# EAGLE board vONE-UNO (EAGLE 9.6.2)
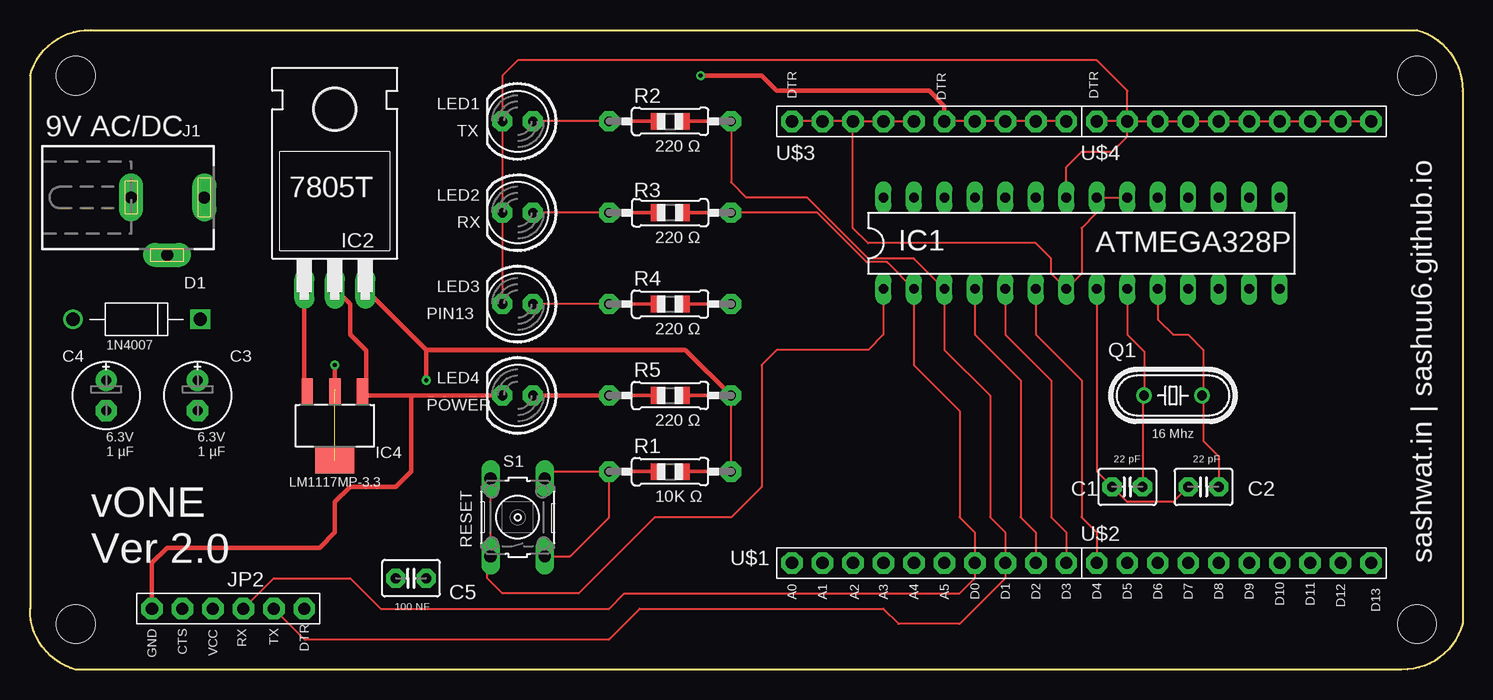
[diagram p0: board, top side]
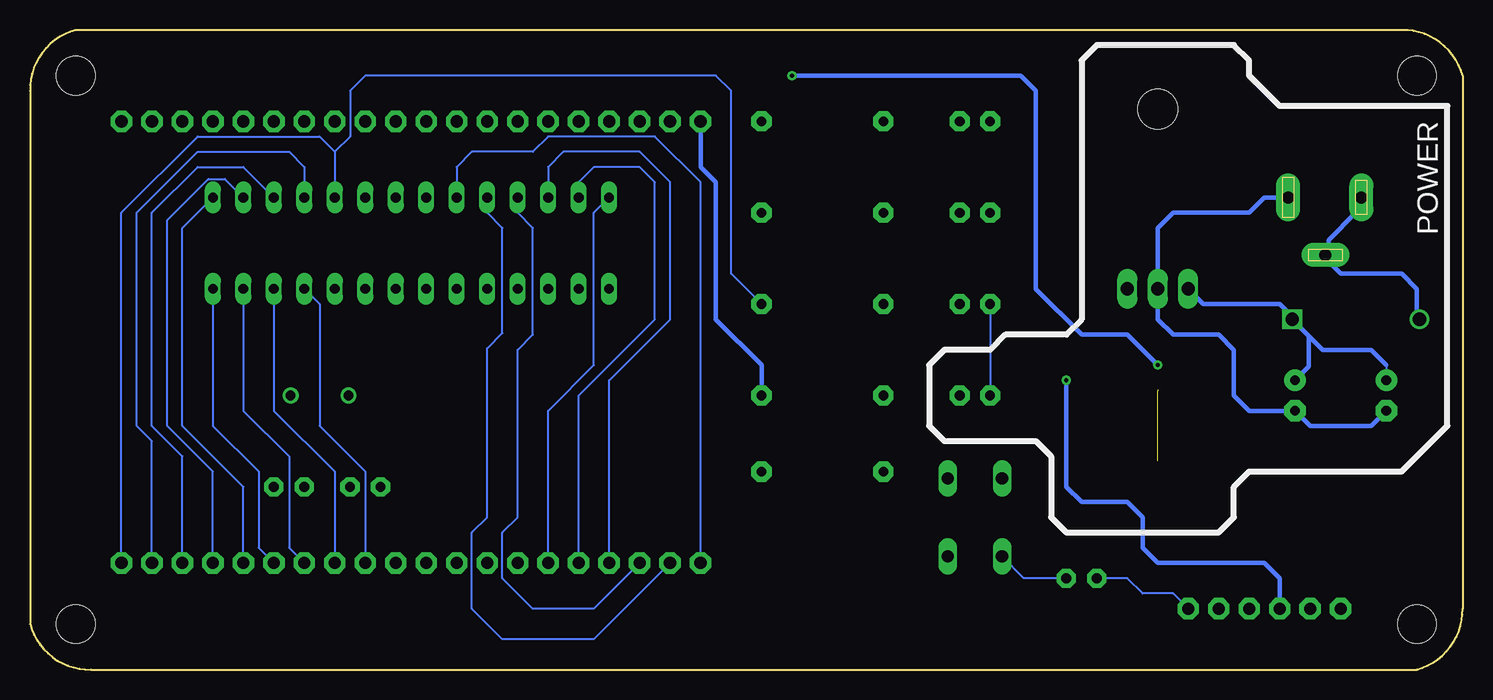
[diagram p1: board, bottom side, seen from below]

Size 119.38 x 53.34 mm. Coordinates in mm from the lower left corner, seen from the top.
Outline: 5.08,53.34 115.57,53.34 arc-76 119.38,48.26 119.38,3.81 arc-76 114.3,0 3.81,0 arc-76 0,5.08 0,49.53 arc-76 5.08,53.34
Copper layers (1*16): Top 0.035mm / dielectric 1.5mm / Bottom 0.035mm
Design rules "default": minimum track width 6mil, minimum drill 0.35mm, track to track 6mil, track to pad 6mil, pad to pad 6mil, via to via 6mil, smd to smd 6mil, copper to edge 40mil, drill to drill 6mil, minimum pad ring 10mil, minimum via ring 8mil, stop-mask expansion 4mil, vias tented up to drill 0mil, thermal gap 10mil
Holes 3.2 mm at 3.81,49.53 3.81,3.81 115.57,3.81 115.57,49.53

## Footprints (pad centres in the part's own frame; a part is rotated, then mirrored left to right if it is on the bottom)
C2.5-3 = drill 0.813 pad 1.6 octagon: 1 -1.27,0; 2 1.27,0
E2,5-6E = drill 0.813 pad 1.778: + -1.27,0 | drill 0.813 pad 1.778 octagon: - 1.27,0
DIOAD1060W80L520D270 = drill 1.1 pad 1.65: A 5.3,0 | drill 1.1 pad 1.65 square: C -5.3,0
DIL28-3 = drill 0.813 long: 1 -16.51,-3.81; 2 -13.97,-3.81; 3 -11.43,-3.81; 4 -8.89,-3.81; 5 -6.35,-3.81; 6 -3.81,-3.81; 7 -1.27,-3.81; 8 1.27,-3.81; 9 3.81,-3.81; 10 6.35,-3.81; 11 8.89,-3.81; 12 11.43,-3.81; 13 13.97,-3.81; 14 16.51,-3.81; 15 16.51,3.81; 16 13.97,3.81; 17 11.43,3.81; 18 8.89,3.81; 19 6.35,3.81; 20 3.81,3.81; 21 1.27,3.81; 22 -1.27,3.81; 23 -3.81,3.81; 24 -6.35,3.81; 25 -8.89,3.81; 26 -11.43,3.81; 27 -13.97,3.81; 28 -16.51,3.81
TO220H = drill 1.118 long: 1 -2.54,-10.16; 2 0,-10.16; 3 2.54,-10.16 | hole 3.302: 0,4.826
SOT223 = smd 0.95 x 2.15: 1 -2.3,-2.9; 2 0,-2.9; 3 2.3,-2.9 | smd 3.25 x 2.15: 4 0,2.9
DCJ0303 = drill 1 pad 2 long: 1 0,3.1; 2 4.8,0; 3 0,-3
1X06-BIG = drill 1.016 pad 1.778 octagon: 1 -6.35,0; 2 -3.81,0; 3 -1.27,0; 4 1.27,0; 5 3.81,0; 6 6.35,0
LED5MM = drill 0.813 pad 1.676 octagon: A -1.27,0; K 1.27,0
HC49/S = drill 0.813: 1 -2.413,0; 2 2.413,0
0805-THM = drill 0.813 pad 1.676 octagon: 1 -5.08,0; 2 5.08,0
B3F-10XX = drill 1.016 long: 1 -3.251,2.261; 2 3.251,2.261; 3 -3.251,-2.261; 4 3.251,-2.261
1X10-BIG = drill 1.016 pad 1.778 octagon: 1 -11.43,0; 2 -8.89,0; 3 -6.35,0; 4 -3.81,0; 5 -1.27,0; 6 1.27,0; 7 3.81,0; 8 6.35,0; 9 8.89,0; 10 11.43,0

## Placement (x,y rotation side)
C1  22pF  [C2.5-3]  91.44,15.24 0 top
C2  22pF  [C2.5-3]  97.79,15.24 0 top
C3  [E2,5-6E]  13.97,22.86 270 top
C4  [E2,5-6E]  6.35,22.86 270 top
C5  100 NF  [C2.5-3]  31.75,7.62 180 top
D1  1N4007  [DIOAD1060W80L520D270]  8.89,29.21 180 top
IC1  ATMEGA328-20P  [DIL28-3]  87.63,35.56 0 top
IC2  7805T  [TO220H]  25.4,41.91 0 top
IC4  LM1117MP-3.3  [SOT223]  25.4,20.32 180 top
J1  [DCJ0303]  11.43,39.37 270 top
JP2  [1X06-BIG]  16.51,5.08 0 top
LED1  [LED5MM]  40.64,45.72 180 top
LED2  [LED5MM]  40.64,38.1 180 top
LED3  [LED5MM]  40.64,30.48 180 top
LED4  [LED5MM]  40.64,22.86 180 top
Q1  16 MHz  [HC49/S]  95.25,22.86 180 top
R1  10K  [0805-THM]  53.34,16.51 0 top
R2  220  [0805-THM]  53.34,45.72 0 top
R3  220  [0805-THM]  53.34,38.1 180 top
R4  220  [0805-THM]  53.34,30.48 0 top
R5  220  [0805-THM]  53.34,22.86 0 top
S1  [B3F-10XX]  40.64,12.7 90 top
U$1  PINHD-1X10  [1X10-BIG]  74.93,8.89 0 top
U$2  PINHD-1X10  [1X10-BIG]  100.33,8.89 0 top
U$3  PINHD-1X10  [1X10-BIG]  74.93,45.72 0 top
U$4  PINHD-1X10  [1X10-BIG]  100.33,45.72 0 top

## Library data of the parts
C1 C2 C5 = capacitor-wima
C3 C4 IC2 JP2 LED1-LED4 R1-R5 U$1-U$4 = adafruit
D1 = 1N4007; AVAILABILITY: Unavailable; DESCRIPTION: Diode Standard 1000V 1A Through Hole DO-41; MF: ON Semiconductor; MP: 1N4007; PACKAGE: DO-41-2 ON Semiconductor; PRICE: None
IC1 = atmega328
IC4 = lm1117_10; MF: Texas Instruments; MPN: LM1117MP-3.3; OC_FARNELL: 9778195; OC_NEWARK: 28X3416
J1 = con-jack; OC_FARNELL: unknown; OC_NEWARK: unknown
Q1 = adafruit; OC_FARNELL: 1667008; OC_NEWARK: unknown
S1 = switch-omron; MPN: B3F-1000; OC_FARNELL: 176432; OC_NEWARK: 36M3542

## Nets
0: C3.- C4.- IC1.22 IC2.2 IC4.1 J1.1 JP2.1 LED1.K LED2.K LED3.K LED4.K U$4.1 U$4.2 U$4.3 U$4.4 U$4.5 U$4.6 U$4.7 U$4.8 U$4.9 U$4.10
N$1: D1.A J1.2 J1.3
N$2: C5.1 IC1.1 S1.1 S1.2
N$3: C1.1 C2.1 IC1.8
N$4: IC1.23 U$1.1
N$5: IC1.24 U$1.2
N$6: IC1.25 U$1.3
N$7: IC1.26 U$1.4
N$8: IC1.27 U$1.5
N$9: IC1.28 U$1.6
N$10: IC1.2 JP2.4 R3.1 U$1.7
N$11: R1.1 S1.3 S1.4
N$12: C1.2 IC1.9 Q1.2
N$13: C2.2 IC1.10 Q1.1
N$14: IC1.4 U$1.9
N$15: IC1.5 U$1.10
N$16: IC1.19 R4.2 U$2.10
N$17: IC1.11 U$2.2
N$18: IC1.12 U$2.3
N$19: IC1.13 U$2.4
N$20: IC1.14 U$2.5
N$21: C5.2 JP2.6
N$22: IC1.15 U$2.6
N$23: IC1.16 U$2.7
N$24: IC1.17 U$2.8
N$25: IC1.18 U$2.9
N$26: LED4.A R5.1
N$28: IC4.2 IC4.4 U$3.6 U$3.7 U$3.8 U$3.9 U$3.10
N$29: LED2.A R3.2
N$30: LED1.A R2.1
N$31: LED3.A R4.1
N$32: IC1.7 IC1.20 IC1.21 IC2.3 JP2.3 R1.2 R5.2 U$3.1 U$3.2 U$3.3 U$3.4 U$3.5
N$34: C3.+ C4.+ D1.C IC2.1 IC4.3
N$36: IC1.6 U$2.1
N$37: IC1.3 JP2.5 R2.2 U$1.8

## Tracks (layer width: path | path; a pad name or v marks a point on that pad's centre or on a via)
0
  Top 0.152: IC2.2 25.4,30.48 | IC1.22 86.36,41.91 87.63,43.18 90.17,43.18 91.44,44.45 U$4.2 | U$4.2 U$4.1 | U$4.2 U$4.3 U$4.4 U$4.5 U$4.6 U$4.7 U$4.8 U$4.9 U$4.10 | 28.06,22.86 28,22.92 IC4.1 | LED3.K LED2.K LED1.K 39.37,49.53 40.64,50.8 88.9,50.8 91.44,48.26 U$4.2
  Top 0.356: IC2.2 26.67,30.48 26.67,27.94 28,26.61 28,22.92 | 28.06,22.86 31.75,22.86 | 31.75,22.86 LED4.K | 31.75,22.86 31.75,16.51 30.48,15.24 26.67,15.24 25.4,13.97 25.4,11.43 24.13,10.16 11.43,10.16 10.16,8.89 JP2.1
  Bottom 0.152: IC2.2 25.4,30.48 | LED3.K LED4.K
  Bottom 0.356: C4.- 7.62,20.32 12.7,20.32 C3.- 17.78,21.59 19.05,22.86 19.05,26.67 20.32,27.94 24.13,27.94 25.4,29.21 IC2.2 25.4,36.83 24.13,38.1 17.78,38.1 16.51,39.37 J1.1
N$1
  Bottom 0.356: J1.3 8.89,38.91 8.89,38.1 11.15,35.84 11.15,34.85 J1.2 11.43,34.29 10.16,33.02 5.08,33.02 3.81,31.75 3.81,29.43 D1.A
N$2
  Top 0.152: IC1.1 71.12,27.94 69.85,26.67 62.23,26.67 60.96,25.4 60.96,15.24 58.42,12.7 52.07,12.7 45.72,6.35 39.37,6.35 38.1,7.62 38.1,9.17 S1.1 S1.2
  Bottom 0.152: S1.1 36.55,7.62 C5.1
N$3
  Top 0.152: IC1.8 88.9,16.51 C1.1 91.44,13.97 95.25,13.97 C2.1
N$4
  Bottom 0.152: U$1.1 63.5,40.64 67.31,44.45 76.2,44.45 77.47,43.18 82.55,43.18 83.82,41.91 IC1.23
N$5
  Bottom 0.152: U$1.2 72.39,2.54 80.01,2.54 82.55,5.08 82.55,11.43 81.28,12.7 81.28,26.8 80.01,28.07 80.01,36.83 81.28,38.1 IC1.24
N$6
  Bottom 0.152: IC1.25 78.74,38.1 77.47,36.83 77.47,27.94 78.74,26.67 78.74,12.7 80.01,11.43 80.01,7.62 77.47,5.08 72.39,5.08 U$1.3
N$7
  Bottom 0.152: U$1.4 71.12,24.13 66.04,29.21 66.04,40.64 68.58,43.18 74.93,43.18 76.2,41.91 IC1.26
N$8
  Bottom 0.152: U$1.5 73.66,22.86 67.31,29.21 67.31,40.64 68.58,41.91 72.39,41.91 73.66,40.64 IC1.27
N$9
  Bottom 0.152: U$1.6 76.2,21.59 72.39,25.4 72.39,38.1 IC1.28
N$10
  Top 0.152: R3.1 65.61,38.1 69.72,33.99 71.42,33.99 IC1.2 73.66,25.4 77.47,21.59 77.47,12.7 78.74,11.43 U$1.7 78.74,7.62 77.47,6.35 49.53,6.35 48.26,5.08 29.21,5.08 26.67,7.62 20.32,7.62 JP2.4
N$11
  Top 0.152: S1.3 45.01,9.45 48.26,12.7 R1.1 43.46,16.51 S1.4
N$12
  Top 0.152: IC1.9 91.44,27.94 92.84,26.54 Q1.2 92.71,22.73 C1.2
N$13
  Top 0.152: IC1.10 93.98,29.21 95.25,27.94 96.52,27.94 97.79,26.67 97.79,22.99 Q1.1 97.79,22.73 97.79,19.05 99.06,17.78 C2.2
N$14
  Top 0.152: IC1.4 78.74,27.94 82.55,24.13 82.55,12.7 83.82,11.43 U$1.9
N$15
  Top 0.152: U$1.10 86.36,11.43 85.09,12.7 85.09,24.13 81.28,27.94 IC1.5
N$16
  Bottom 0.152: U$2.10 111.76,38.1 105.41,44.45 95.25,44.45 93.98,43.18 | 93.98,43.18 IC1.19 | R4.2 60.96,33.02 60.96,48.26 62.23,49.53 91.44,49.53 92.71,48.26 92.71,44.45 93.98,43.18
N$17
  Bottom 0.152: IC1.11 95.25,30.48 95.25,20.32 91.44,16.51 U$2.2
N$18
  Bottom 0.152: IC1.12 99.06,21.59 93.98,16.51 U$2.3
N$19
  Bottom 0.152: IC1.13 101.6,21.59 97.79,17.78 97.79,10.16 U$2.4
N$20
  Bottom 0.152: IC1.14 104.14,20.32 100.33,16.51 100.33,10.16 U$2.5
N$21
  Bottom 0.152: JP2.6 24.13,6.35 26.67,6.35 27.94,7.62 C5.2
N$22
  Bottom 0.152: U$2.6 101.6,15.24 106.68,20.32 106.68,36.83 IC1.15
N$23
  Bottom 0.152: U$2.7 104.14,16.51 107.95,20.32 107.95,37.48 104.51,40.92 103.15,40.92 IC1.16
N$24
  Bottom 0.152: U$2.8 106.68,17.78 109.22,20.32 109.22,38.1 105.41,41.91 101.6,41.91 IC1.17
N$25
  Bottom 0.152: U$2.9 109.22,19.05 110.49,20.32 110.49,38.1 105.41,43.18 97.79,43.18 96.52,41.91 IC1.18
N$26
  Top 0.356: R5.1 LED4.A
N$28  (via drill 0.35)  (2 unrouted)
  Top 0.152: U$3.10 U$3.9 U$3.8 U$3.7 U$3.6
  Top 0.356: v25.4,25.4 25.4,23.37 | v55.88,49.53 60.96,49.53 62.23,48.26 74.93,48.26 76.2,46.99 U$3.6
  Bottom 0.356: v25.4,25.4 27.94,27.94 31.75,27.94 35.56,31.75 35.56,48.26 36.83,49.53 v55.88,49.53
N$29
  Top 0.152: R3.2 LED2.A
N$30
  Top 0.152: R2.1 LED1.A
N$31
  Top 0.152: R4.1 LED3.A
N$32  (via drill 0.35)
  Top 0.152: IC1.20 IC1.21 88.9,38.1 87.63,36.83 87.63,33.02 IC1.7 85.09,33.02 85.09,34.29 83.82,35.56 69.85,35.56 68.58,36.83 U$3.3 | U$3.3 U$3.4 U$3.5 | U$3.3 U$3.2 U$3.1 | R1.2 R5.2
  Top 0.356: IC2.3 33.02,26.67 | 33.02,26.67 54.61,26.67 R5.2 | 33.02,26.67 v33.02,24.13
  Bottom 0.356: U$3.1 63.5,41.91 62.23,40.64 62.23,29.21 58.42,25.4 R5.2 | JP2.3 15.24,7.62 16.51,8.89 25.4,8.89 26.67,10.16 26.67,12.7 27.94,13.97 31.75,13.97 33.02,15.24 v33.02,24.13
N$34
  Top 0.152: IC4.3 22.86,23.46
  Top 0.356: 22.86,23.46 IC2.1
  Bottom 0.152: 6.35,25.4 C4.+
  Bottom 0.356: 12.81,27.83 D1.C 14.19,29.43 15.24,30.48 21.59,30.48 IC2.1 | 12.81,27.83 11.65,26.67 7.62,26.67 6.35,25.4 | C3.+ 12.81,25.29 12.81,27.83
N$36
  Top 0.152: IC1.6 83.82,27.94 87.63,24.13 87.63,12.7 88.9,11.43 U$2.1
N$37
  Top 0.152: R2.2 58.42,40.64 59.69,39.37 64.77,39.37 69.85,34.29 73.66,34.29 IC1.3 76.2,26.67 80.01,22.86 80.01,12.7 81.28,11.43 U$1.8 81.28,7.62 77.47,3.81 72.39,3.81 71.12,5.08 50.8,5.08 48.26,2.54 22.86,2.54 JP2.5

## Text on the board
tPlace: 9V AC/DC | TX | 220 Ω | 7805T | RX | 220 Ω | PIN13 | 220 Ω | 1N4007 | POWER | 220 Ω | 6.3V / 1 µF | 6.3V / 1 µF | LM1117MP-3.3 | 10K Ω | RESET | vONE / Ver 2.0 | sashwat.in | sashuu6.github.io
bPlace: POWER
tNames: DTR | DTR | DTR | ATMEGA328P | 16 Mhz | 22 pF | 22 pF | A0 | A1 | A2 | A3 | A4 | A5 | D0 | D1 | D2 | D3 | D4 | D5 | D6 | D7 | D8 | D9 | D10 | D11 | 100 NF | D12 | D13 | CTS | RX | TX | DTR | GND | VCC